# EAGLE board powerbench (EAGLE 6.4)
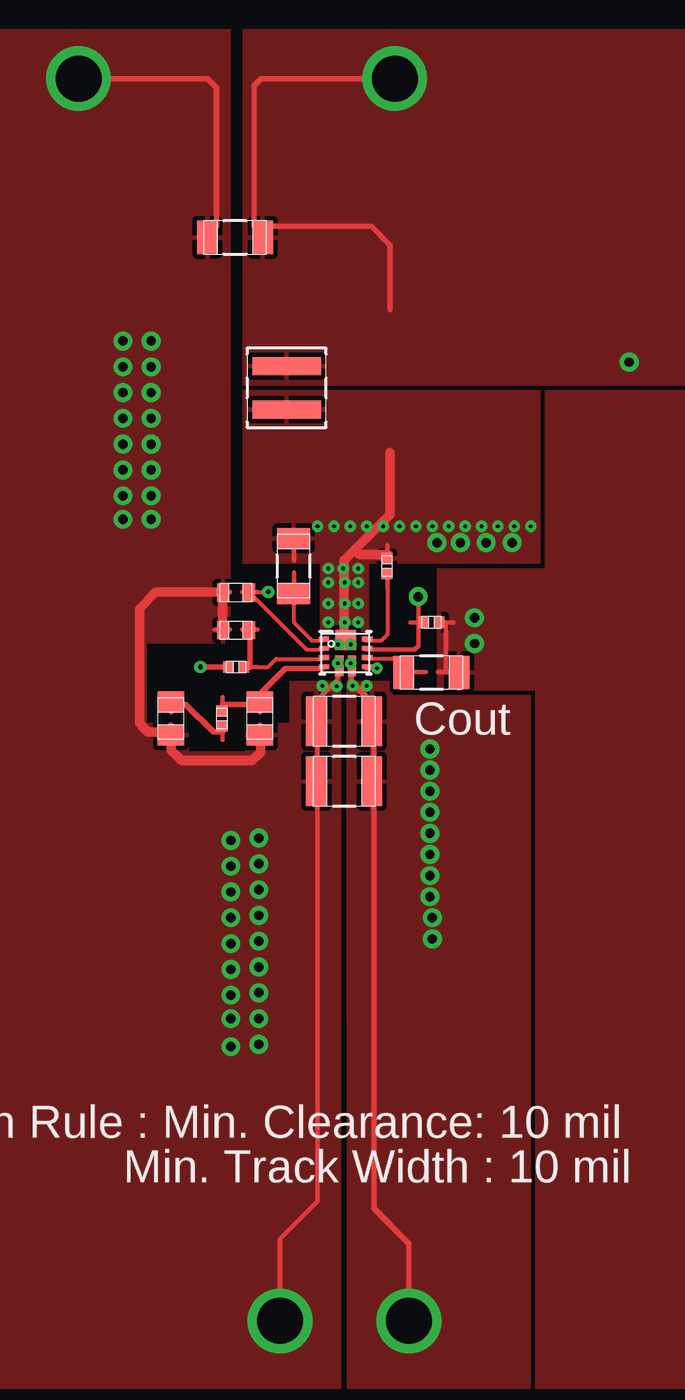
[diagram p0: board, top side]
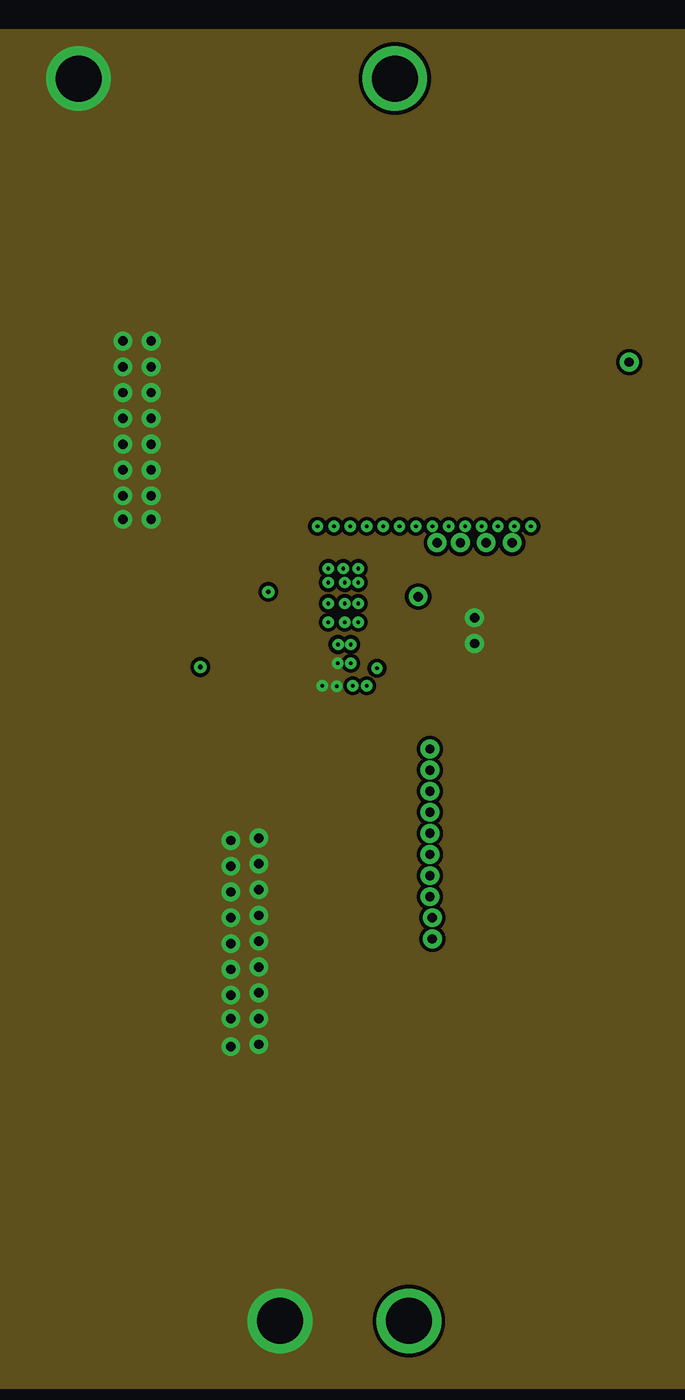
[diagram p1: board, inner layer INTERNAL1]
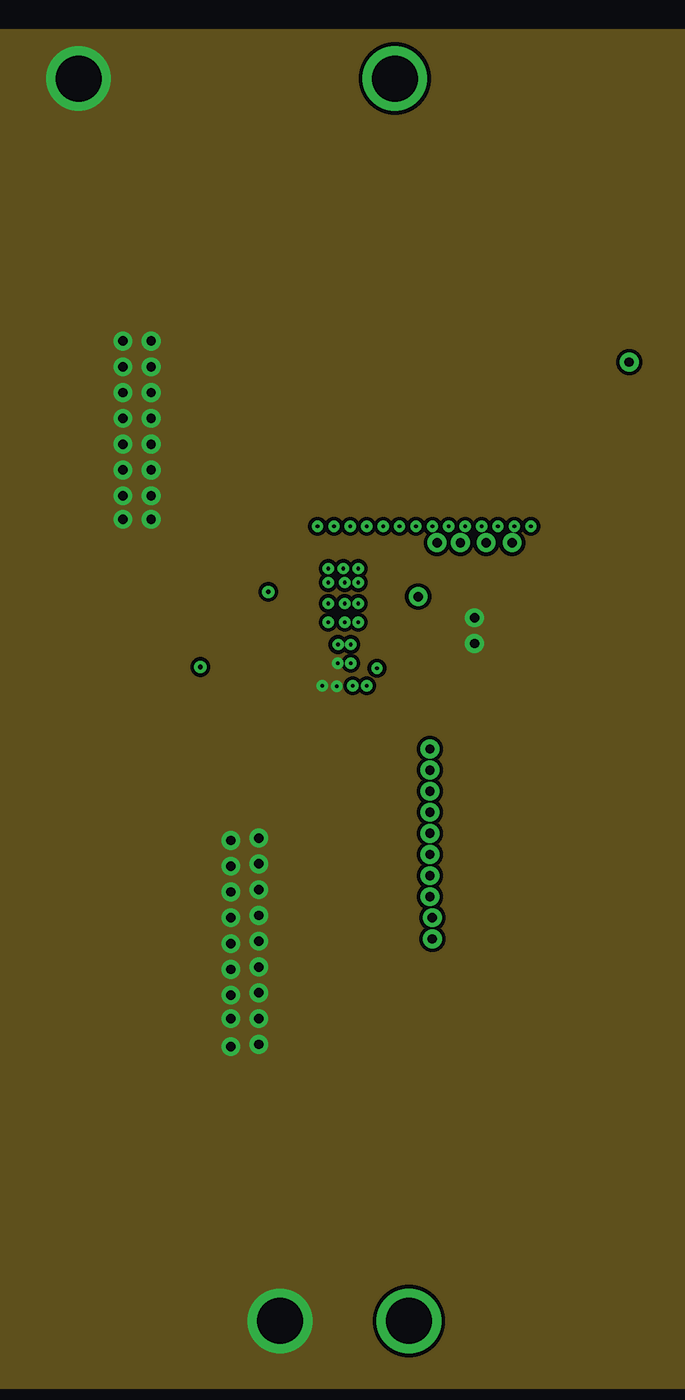
[diagram p2: board, inner layer INTERNAL2]
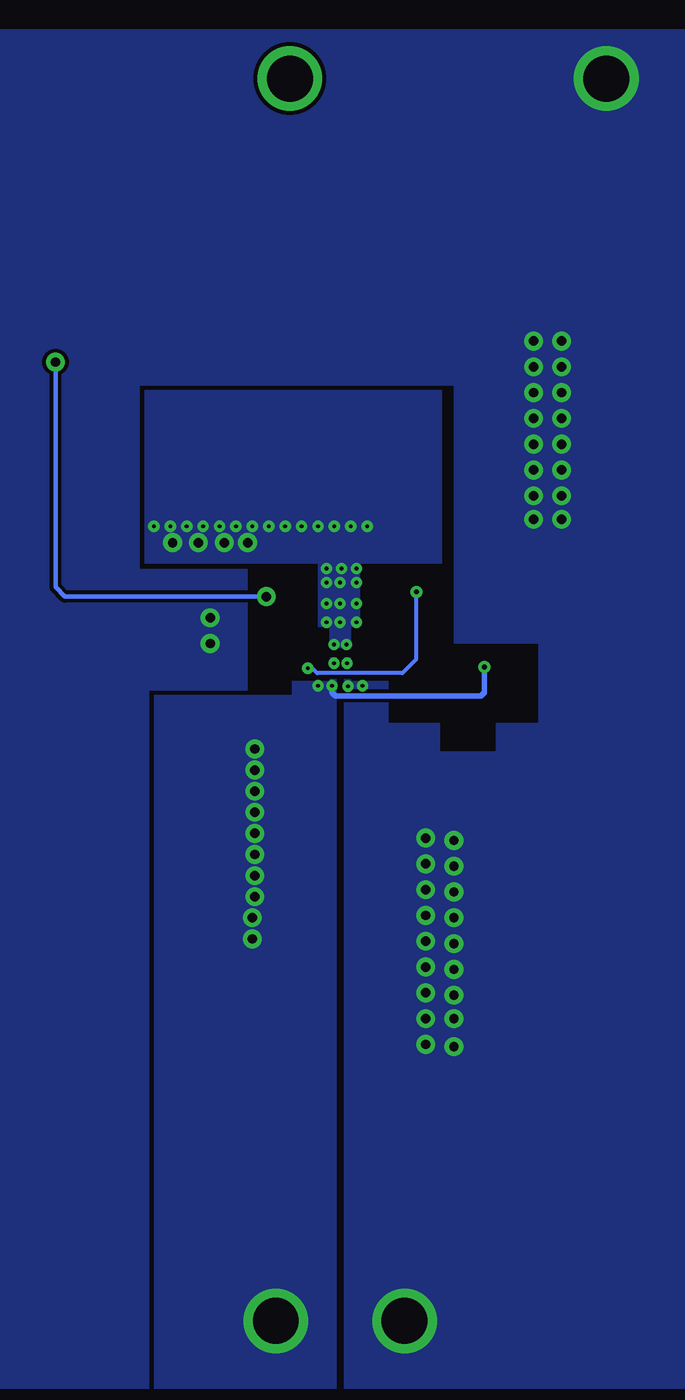
[diagram p3: board, bottom side, seen from below]

No outline drawn. Coordinates in mm, seen from the top.
Copper layers ((1*2)+(15*16)): TOP / INTERNAL1 / layer 15 / BOTTOM

## Footprints (pad centres in the part's own frame; a part is rotated, then mirrored left to right if it is on the bottom)
0402 = smd 0.559 x 0.61: 1 -0.419,0; 2 0.419,0
0805 = smd 1.118 x 1.448: 1 -0.902,0; 2 0.902,0
1206_190 = smd 1.118 x 1.803: 1 -1.499,0; 2 1.499,0
1210_280 = smd 1.118 x 2.692: 1 -1.499,0; 2 1.499,0
0603 = smd 0.66 x 0.965: 1 -0.699,0; 2 0.699,0
TP-1502 = drill 0.813 round: 1 0,0
XAL4020 = smd 0.965 x 3.708: 1 -1.181,0; 2 1.181,0
1206 = smd 1.118 x 1.803: 1 -1.499,0; 2 1.499,0
RNR0011A = smd 0.55 x 0.25: 1 -1.175,0.75; 2 -1.175,0.25; 3 -1.175,-0.25; 4 -1.175,-0.75; 7 1.175,-0.75; 8 1.175,-0.25; 9 1.175,0.25; 10 1.175,0.75 | smd 0.45 x 1.1: 5 -0.35,-0.7; 6 0.35,-0.7 | smd 1.1 x 1.1: 11 0,0.7

## Placement (x,y rotation side)
Cbst  [0402]  56.72,71.25 90 top
Ccomp  [0805]  45.01,62.99 270 top
Ccomp2  [0805]  49.83,62.99 270 top
Cin  [1206_190]  48.49,89.05 180 top
Cin2  [0402]  59.13,68.2 0 top
Cout_1  [1210_280]  54.41,62.84 180 top
Cout_2  [1210_280]  54.41,59.59 180 top
Cvcc  [0603]  48.54,69.82 180 top
GND  [TP-1502]  50.9,30.33 90 top
GND1  [TP-1502]  39.98,97.64 90 top
L1  [XAL4020]  51.28,80.9 270 top
Rcomp  [0402]  47.78,62.99 270 top
Rfbb  [0603]  48.54,67.77 180 top
Rfbt  [0402]  48.54,65.79 0 top
Rlim  [1206]  59.13,65.48 0 top
Rt  [1206]  51.66,71.25 270 top
U1  [RNR0011A]  54.48,66.55 0 top
VIN  [TP-1502]  57.15,97.64 90 top
VOUT  [TP-1502]  57.89,30.33 90 top

## Library data of the parts
Cbst = ultra-librarian; RefDes: Cbst; Type: GRM155R61A104KA01D
Ccomp = ultra-librarian; RefDes: Ccomp; Type: CC0805KRX7R9BB471
Ccomp2 = ultra-librarian; RefDes: Ccomp2; Type: C0805C220K3GACTU
Cin = ultra-librarian; RefDes: Cin; Type: GRM31CR60J107ME39L
Cin2 = ultra-librarian; RefDes: Cin2; Type: GRM155R60J104KA01D
Cout_1 Cout_2 = ultra-librarian
Cvcc = ultra-librarian; RefDes: Cvcc; Type: GRM188R61A225KE34D
GND = ultra-librarian; RefDes: GND; Type: TP-1502
GND1 = ultra-librarian; RefDes: GND1; Type: TP-1502
L1 = ultra-librarian; RefDes: L1; Type: XAL4020-601MEB
Rcomp = ultra-librarian; RefDes: Rcomp; Type: CRCW040253K6FKED
Rfbb = ultra-librarian; RefDes: Rfbb; Type: RC0603FR-0782KL
Rfbt = ultra-librarian; RefDes: Rfbt; Type: CRCW0402324KFKED
Rlim = ultra-librarian; RefDes: Rlim; Type: ERJ-8ENF1183V
Rt = ultra-librarian; RefDes: Rt; Type: ERJ-8ENF3093V
U1 = ultra-librarian; RefDes: U1; Type: TPS61089RNRR
VIN = ultra-librarian; RefDes: VIN; Type: TP-1502
VOUT = ultra-librarian; RefDes: VOUT; Type: TP-1502

## Nets
0: Ccomp2.2 Ccomp.2 Cin2.2 Cin.2 Cout_1.2 Cout_2.2 Cvcc.2 GND1.1 GND.1 Rfbb.2 Rlim.2 U1.5
2: Ccomp2.1 Rcomp.1 U1.4
3: Cin2.1 Cin.1 L1.1 U1.9 VIN.1
4: Cout_1.1 Cout_2.1 Rfbt.1 U1.6 VOUT.1
6: Rfbb.1 Rfbt.2 U1.3
7: Cbst.2 L1.2 Rt.1 U1.11
8: Rt.2 U1.1
9: Ccomp.1 Rcomp.2
11: Rlim.1 U1.8
13: Cbst.1 U1.10
15: Cvcc.1 U1.2 U1.7

## Tracks (layer width: path | path; a pad name or v marks a point on that pad's centre or on a via)
0  (via drill 0.2 pad 0.46, 0.51 pad 1.02, 2.49 pad 3.48)
  TOP 0.254: 59.92,65.53 59.92,68.2 | v54.05,65.99 54.05,65.1 52.96,64.01 52.96,62.48 52.96,36.83 50.93,34.8 v50.93,30.35 | 47.37,67.81 48.21,67.81 | 49.85,61.82 49.85,62.66 | 45.02,61.82 45.02,62.66 | 59.49,65.52 60.33,65.52 | 59.49,68.19 60.33,68.19 | 47.37,69.84 48.21,69.84
  TOP 0.305: v40.01,97.66 46.99,97.66 47.5,97.16 47.5,89.66
  TOP 0.508: 49.86,62.26 49.86,61.16 49.4,60.71 45.59,60.71 45.03,61.27 45.03,62.26 43.76,62.26 43.31,62.74 43.31,68.96 44.2,69.85 47.8,69.85 47.8,67.82
  other vias: 49.78,56.52 42.42,73.79 43.94,73.79 42.42,75.06 43.94,75.06 42.42,76.45 43.94,76.45 42.42,77.85 43.94,77.85 43.94,83.44 42.42,83.44 43.94,82.04 42.42,82.04 43.94,80.64 42.42,80.64 43.94,79.25 42.42,79.25 48.26,52.2 49.78,49.53 48.26,53.59 49.78,50.93 48.26,54.99 49.78,52.32 48.26,56.39 49.78,53.72 49.78,55.12 49.78,48.13 48.26,50.8 49.78,46.74 48.26,49.4 49.78,45.34 48.26,48.01 48.26,46.74 53.21,64.77 61.47,67.06 61.47,68.45 48.26,45.21 54,64.74
  pour TOP (rank 5): 59.44,71.12 65.28,71.12 65.28,80.77 77.47,80.77 77.47,26.67 64.77,26.67 64.77,64.52 59.44,64.52
  pour TOP (rank 5): 26.67,100.33 48.26,100.33 48.26,67.06 43.69,67.06 43.69,62.74 45.97,62.74 45.97,61.21 49.02,61.21 49.02,62.74 51.44,62.74 51.44,65.02 53.85,65.02 53.85,66.29 54.23,66.29 54.23,26.67 26.67,26.67
  pour BOTTOM (rank 4): 77.47,100.33 77.47,26.67 64.77,26.67 64.77,64.52 59.44,64.52 59.44,71.09 65.28,71.12 65.28,81.03 48.26,81.03 48.26,67.06 43.69,67.06 43.69,62.74 45.97,62.74 45.97,61.21 49.02,61.21 49.02,62.74 51.82,62.74 51.82,65.02 53.85,65.02 53.85,66.29 54.23,66.29 54.23,26.67 26.67,26.67 26.67,100.33
  pour INTERNAL2 (rank 3): 26.67,100.33 77.47,100.33 77.47,26.67 26.67,26.67
  pour INTERNAL1 (rank 4): 26.67,100.33 77.47,100.33 77.47,26.67 26.67,26.67 26.67,100.33
2
  TOP 0.254: 49.85,63.32 49.85,64.16 | 47.82,63.32 47.82,64.16
  TOP 0.305: 47.83,63.75 49.86,63.75 49.86,64.34 51.23,65.71 53.21,65.71
3  (via drill 0.51 pad 1.02, 2.49 pad 3.48)
  TOP 0.254: 55.58,66.73 58.22,66.73 58.42,66.93 58.42,68.2 58.42,69.57 | 57.99,68.19 58.83,68.19
  TOP 0.305: v57.15,97.66 49.91,97.66 49.53,97.28 49.53,89.66 55.88,89.66 56.9,88.65 56.9,85.14
  BOTTOM 0.254: v58.42,69.6 69.34,69.6 69.85,70.1 v69.85,82.3
  pour TOP (rank 2): 48.9,100.33 48.9,81.03 77.47,81.03 77.47,100.33
4  (via drill 0.2 pad 0.46, 0.25 pad 0.51, 0.51 pad 1.02, 2.49 pad 3.48)
  TOP 0.254: 47.37,65.77 48.21,65.77
  TOP 0.305: v46.61,65.79 47.8,65.79 | v46.61,65.79 | v57.91,30.35 57.91,34.54 56.01,36.45 56.01,63.75 54.76,65 v54.76,65.99
  BOTTOM 0.305: v46.61,65.79 46.61,64.39 46.79,64.21 54.69,64.21 54.86,64.39 v54.86,64.77
  other vias: 59.05,60.2 59.05,61.34 59.18,51.05 59.18,52.2 59.05,59.05 59.05,57.91 59.05,56.77 59.05,55.63 59.05,54.48 59.05,53.34 55.63,64.77
  pour TOP (rank 2): 54.97,66.29 54.97,65.02 57.02,65.02 57.02,64.26 64.52,64.26 64.52,26.67 54.56,26.67 54.53,66.29
  pour BOTTOM: 54.61,66.29 54.97,66.29 54.97,65.02 57.02,65.02 57.02,64.26 64.52,64.26 64.52,26.67 54.61,26.67
6
  TOP 0.229: 49.3,65.79 50.29,65.79 50.72,66.22 53.21,66.22
  TOP 0.254: 48.87,67.81 49.71,67.81 | 48.87,65.77 49.71,65.77
  TOP 0.305: 49.3,65.79 49.3,67.82
7  (via drill 0.2 pad 0.46, 0.51 pad 1.02)
  TOP 0.254: 51.68,71.55 51.68,72.39 | 56.76,71.55 56.76,72.39
  TOP 0.508: 56.9,77.39 56.9,74.04 54.41,71.55 54.41,67.18 | 54.99,72.14 55.24,71.88 56.77,71.88
  other vias: 54.36,71.12 55.17,71.12 53.54,69.22 54.43,69.22 55.17,69.22 54.76,67.01 55.17,68.2 54.43,68.2 53.54,68.2 54.08,67.01 63.5,72.52 62.1,72.52 60.71,72.52 59.44,72.52 64.52,73.41 63.63,73.41 62.74,73.41 61.85,73.41 60.96,73.41 60.07,73.41 55.17,70.36 54.43,70.36 53.54,70.36 53.85,73.41 54.74,73.41 55.63,73.41 56.52,73.41 57.4,73.41 58.29,73.41 52.96,73.41 59.18,73.41 53.54,71.12
  pour TOP (rank 3): 53.09,67.61 53.85,67.61 53.85,66.8 54.99,66.8 54.99,67.69 55.75,67.69 55.75,71.37 65.02,71.37 65.02,80.77 48.9,80.77 48.9,71.37 53.09,71.37
  pour BOTTOM: 48.9,80.77 65.02,80.77 65.02,71.37 55.63,71.37 55.63,67.94 54.99,67.94 54.99,66.8 53.85,66.8 53.85,67.94 53.34,67.94 53.34,71.37 48.9,71.37
8
  TOP 0.229: 53.21,67.21 52.65,67.21 51.69,68.2 51.69,70.48
  TOP 0.254: 51.68,70.05 51.68,70.89
9
  TOP 0.254: 47.82,61.82 47.82,62.66 | 45.02,63.32 45.02,64.16
  TOP 0.305: 45.03,63.75 45.82,63.75 47.32,62.26 47.83,62.26
11
  TOP 0.229: 55.58,66.22 55.58,66.24 57.05,66.24 57.78,65.53 58.42,65.53
  TOP 0.254: 57.99,65.52 58.83,65.52
13
  TOP 0.229: 55.58,67.21 56.41,67.21 56.77,67.56 56.77,70.48
  TOP 0.254: 56.76,70.05 56.76,70.89
15  (via drill 0.2 pad 0.46, 0.25 pad 0.51)
  TOP 0.229: 55.58,65.71 v56.19,65.71 | v56.19,65.71 | 53.21,66.73 52.38,66.73 49.28,69.83 | 49.3,69.85 v50.29,69.85 | 49.3,69.85
  TOP 0.254: 48.87,69.84 49.71,69.84
  BOTTOM 0.229: v56.19,65.71 55.93,65.71 55.68,65.46 51.05,65.46 50.29,66.22 v50.29,69.85

## Text on the board
ASSYNOTES: Cout | Design Rule : Min. Clearance: 10 mil | Min. Track Width : 10 mil